# Altium PCB Frequency_REF_Module.PCBDOC
Units mm, origin at the board's own origin, x right, y up, seen from the top; angles counter-clockwise.
Board outline 160 x 100 mm, 4 copper layers (L1, L2, L3, L4), stack 1.57 mm thick; 49 components, 44 nets, 191 pads, 213 vias.
Unrouted connection lines stored in the file: 2.
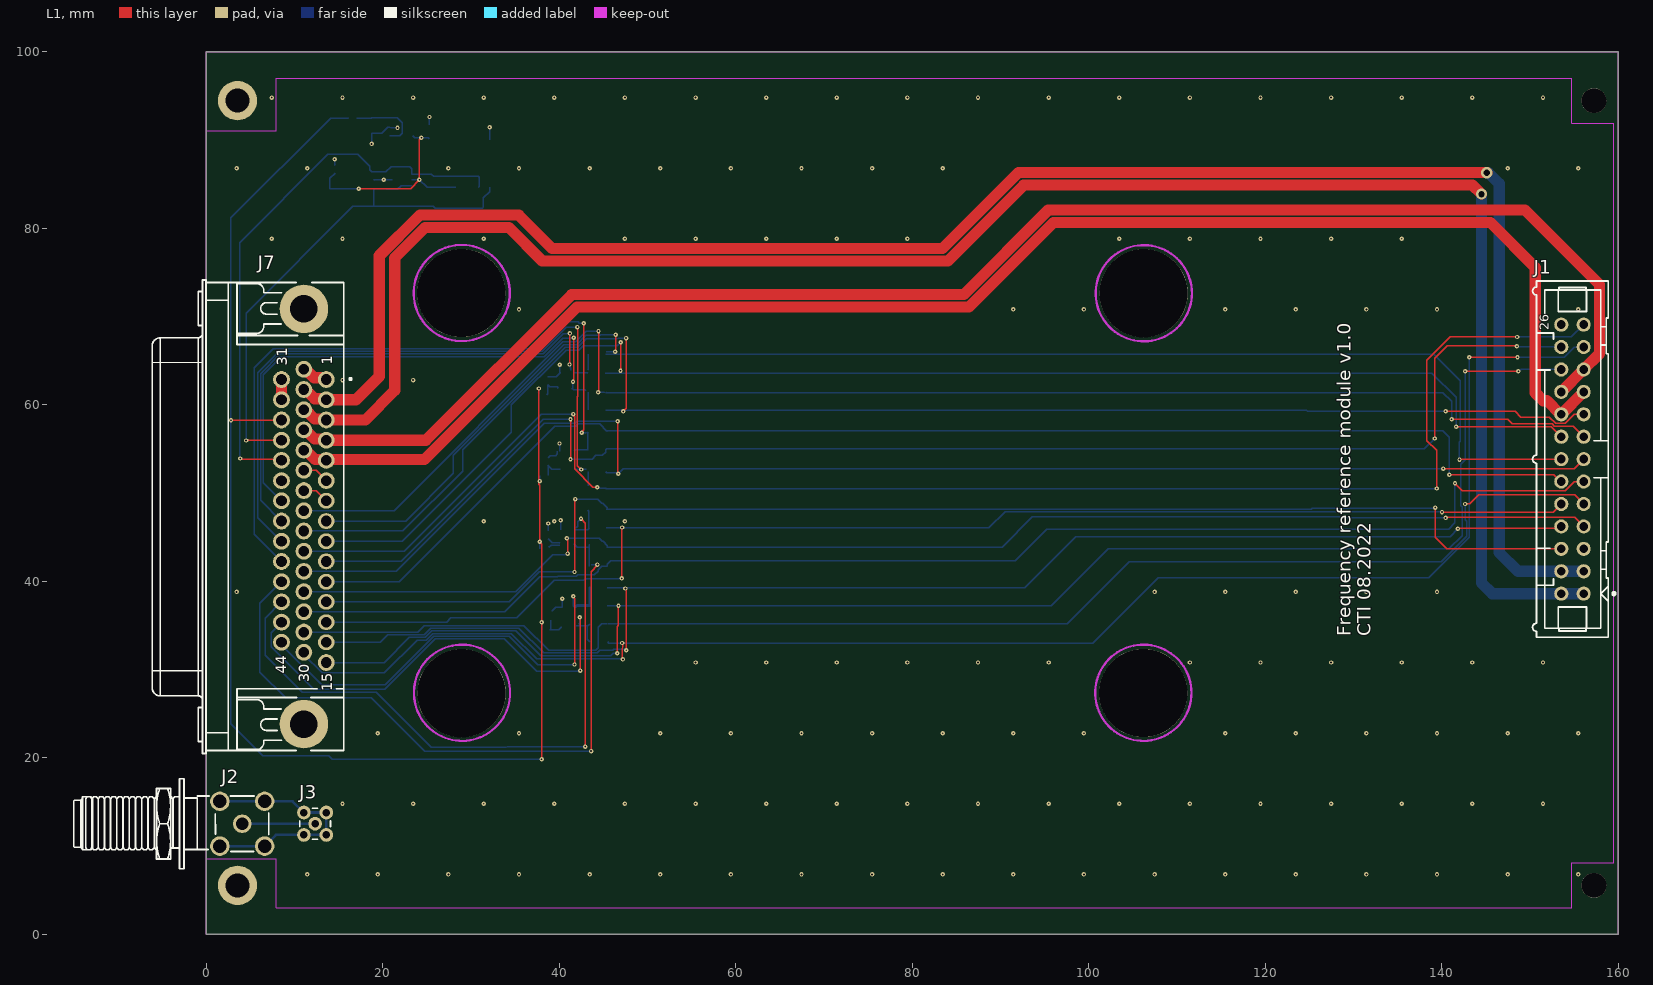
[diagram p0: L1 view]
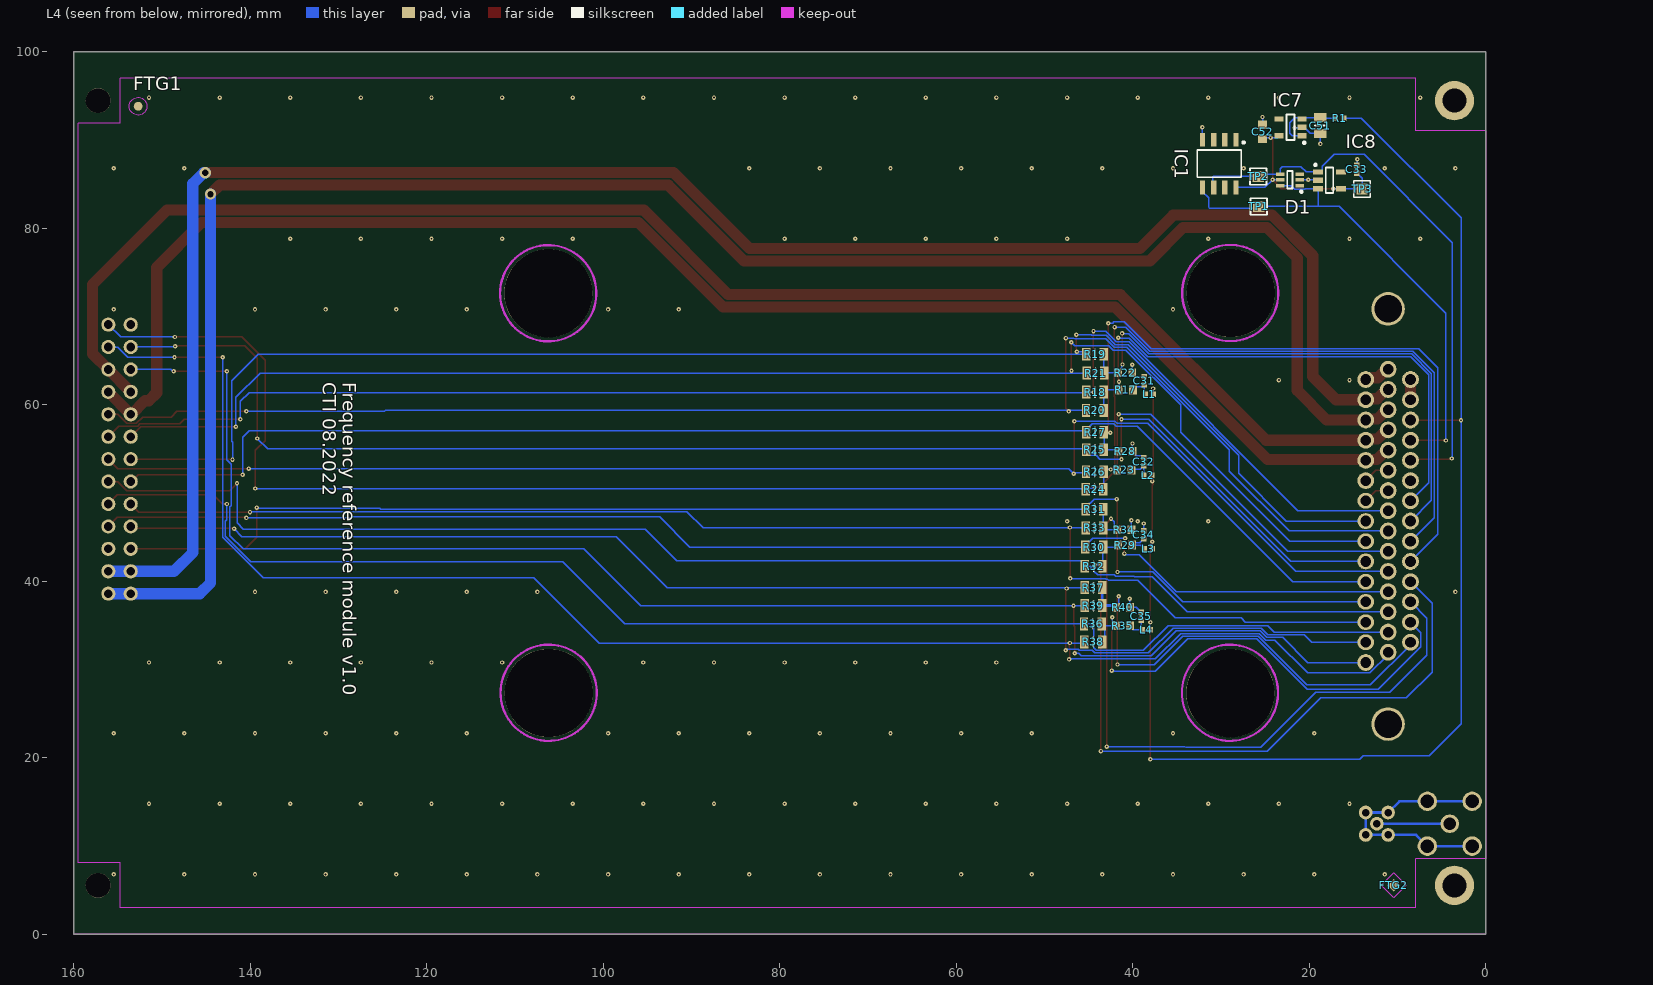
[diagram p1: L4 view, seen from below]
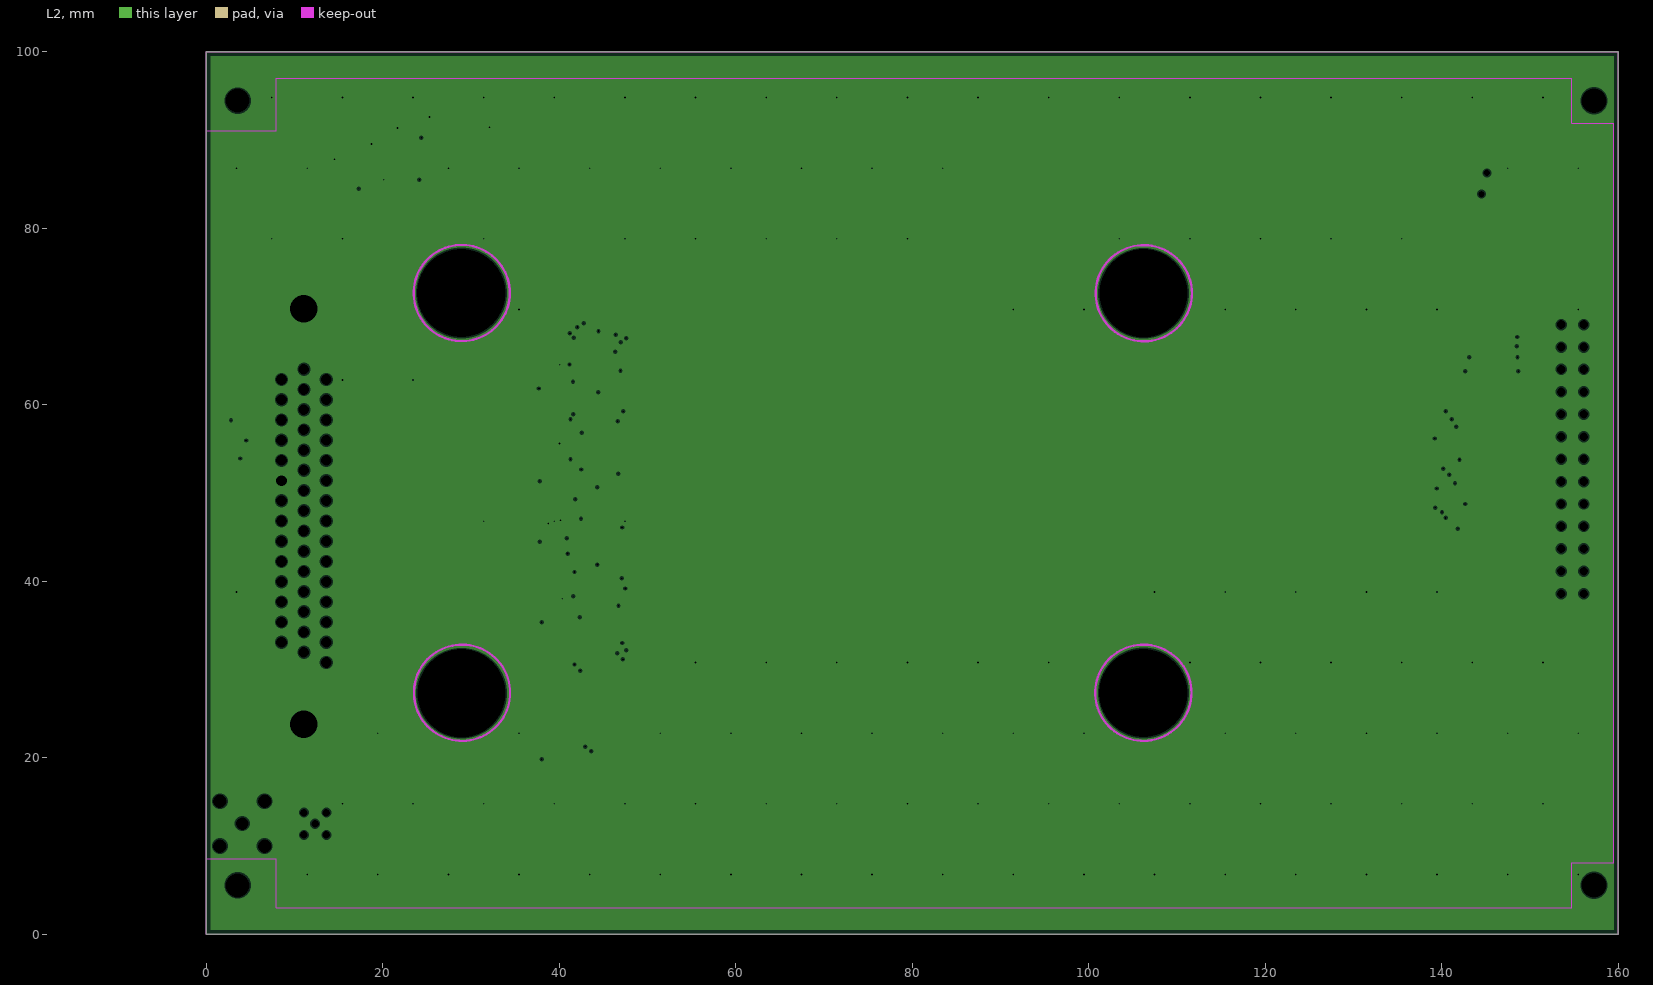
[diagram p2: L2, clearances drawn from the general rule]
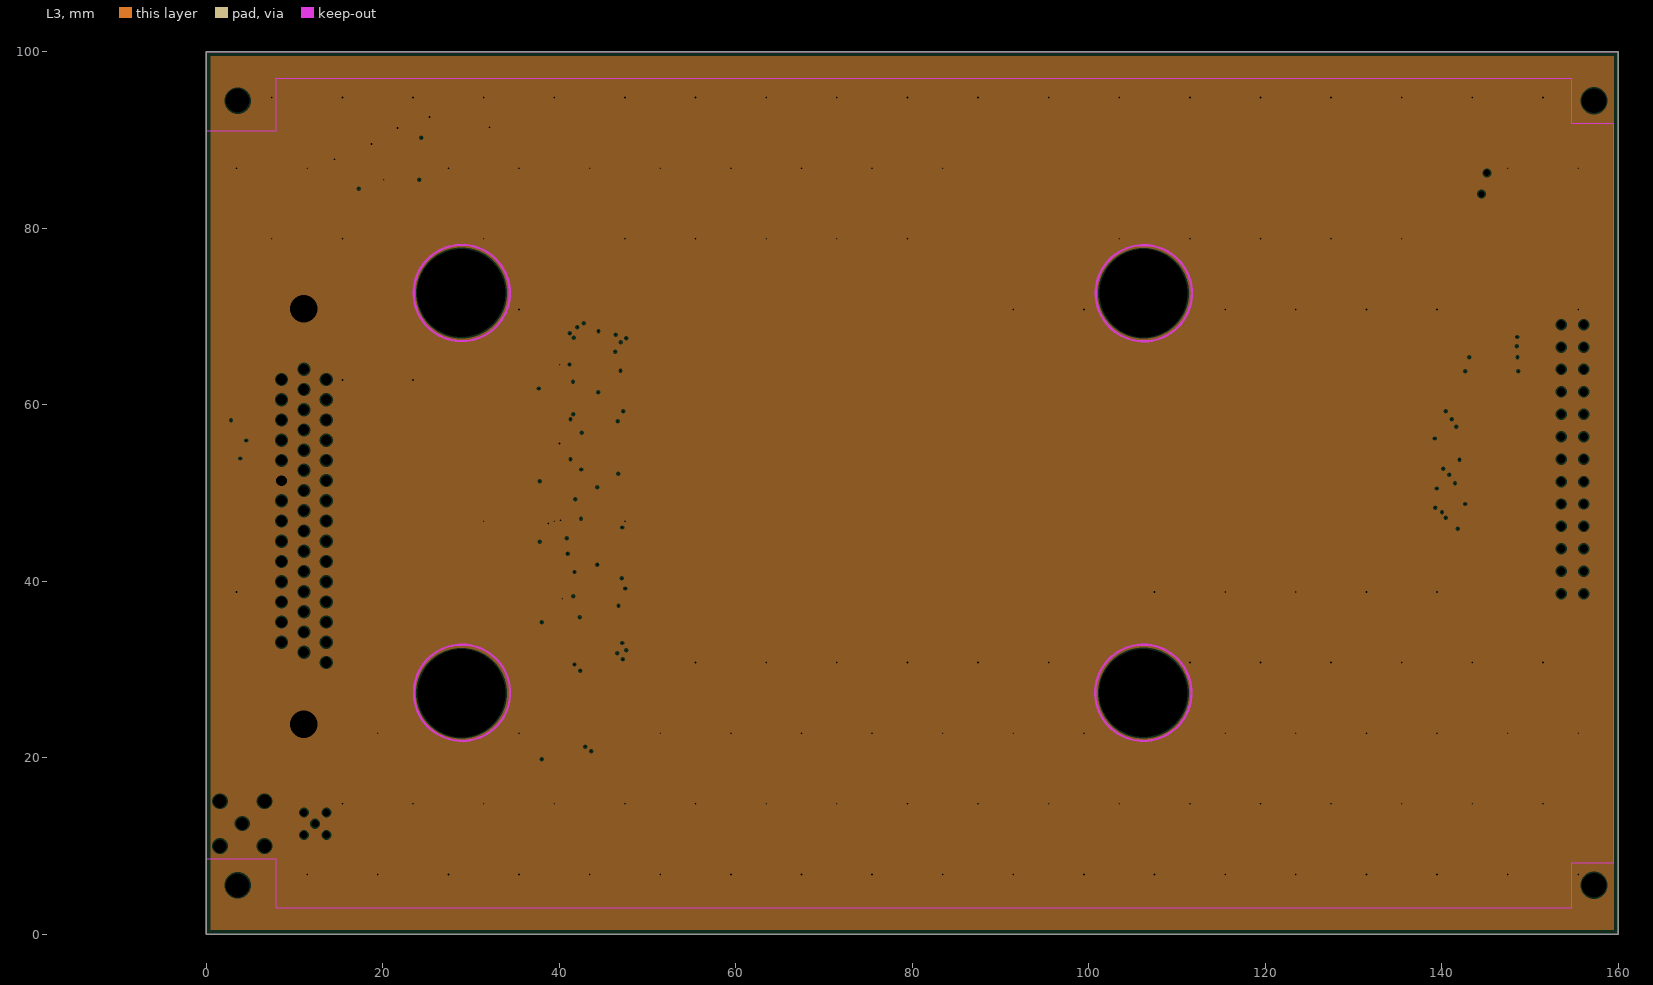
[diagram p3: L3, clearances drawn from the general rule]
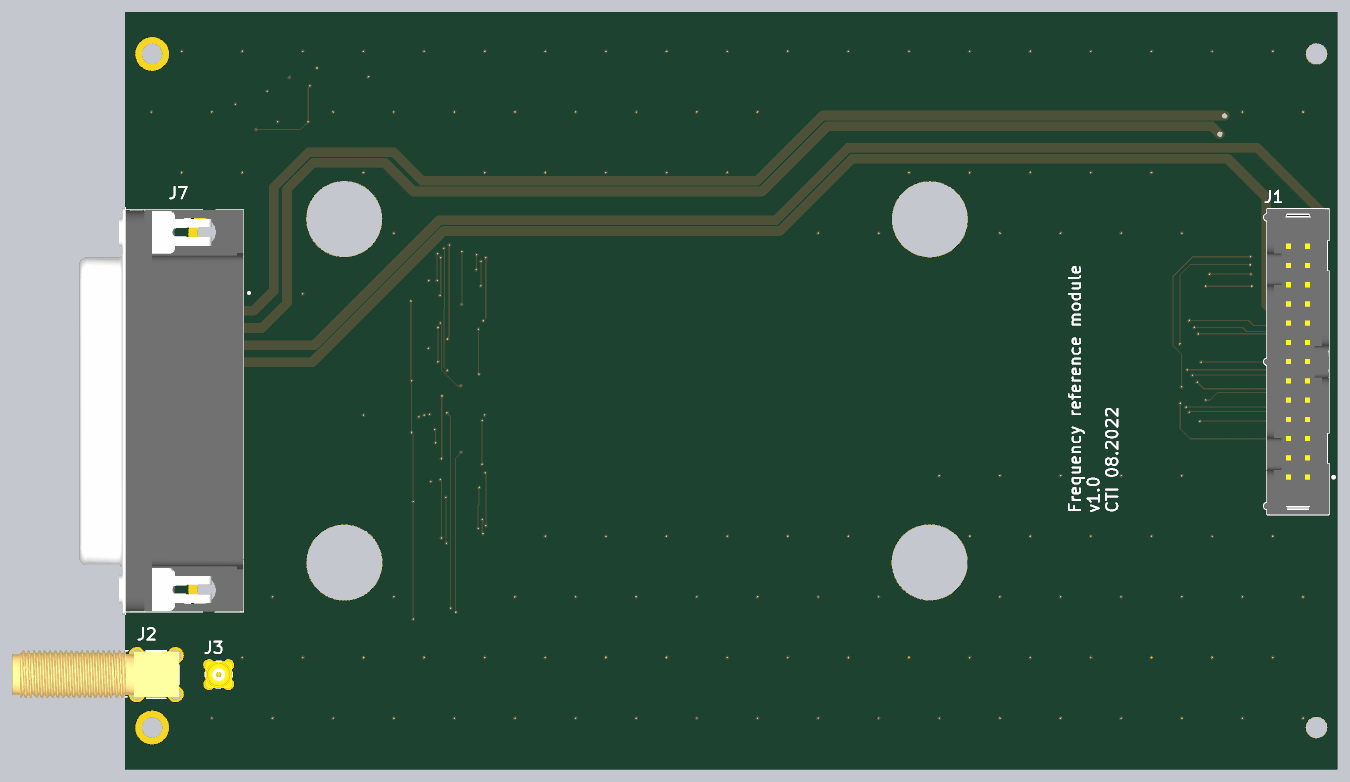
[diagram p4: 3D render of the assembled board from above, using the file's embedded part models]
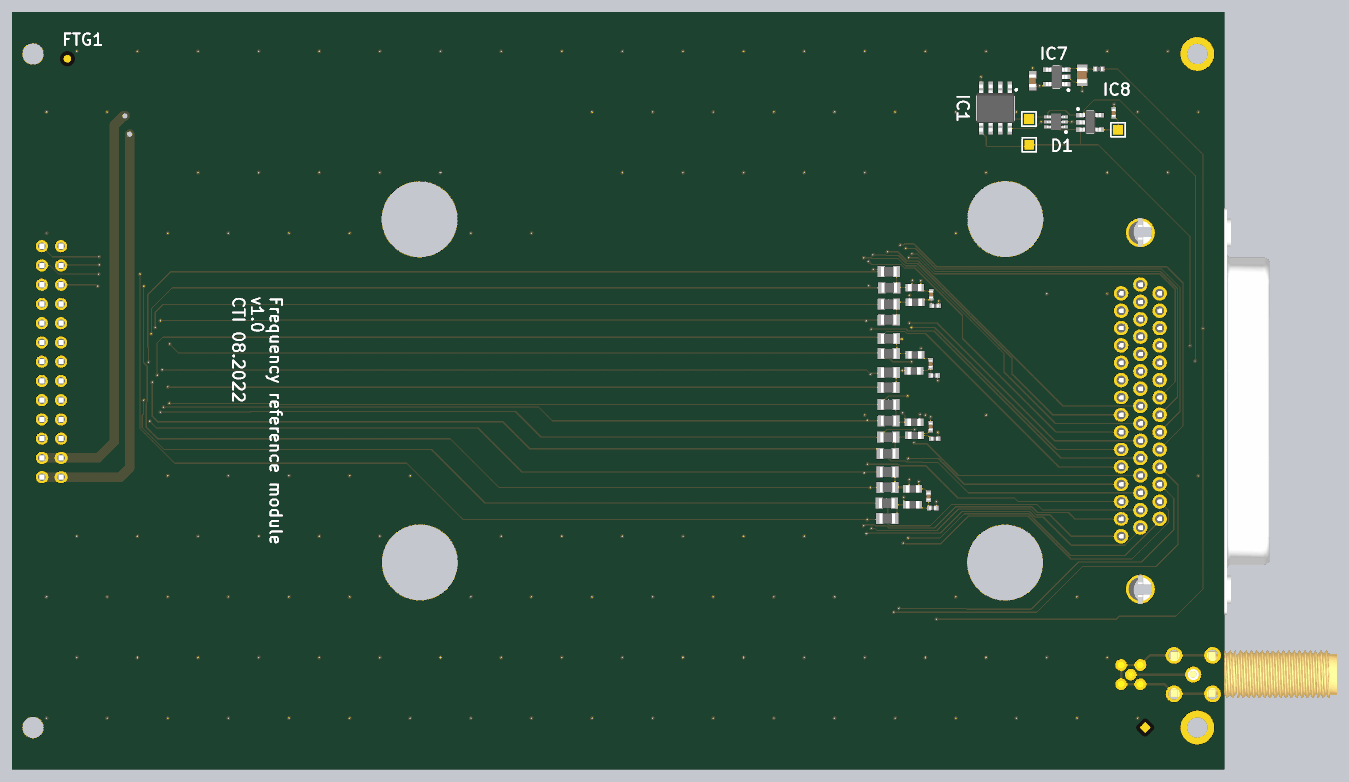
[diagram p5: 3D render of the assembled board from below, using the file's embedded part models]

## Layer stack, top to bottom
Top Solder: solder mask 0.01, Solder Resist, Dk 3.5
L1: signal copper 0.035
Dielectric 1: prepreg 0.36, PP-006, Dk 4.1
L2: plane copper 0.035, net GND
Dielectric1: core 0.71, FR-4, Dk 4.8
L3: plane copper 0.035, net GND
Dielectric 2: prepreg 0.36, PP-006, Dk 4.1
L4: signal copper 0.035
Bottom Solder: solder mask 0.01, Solder Resist, Dk 3.5

## Board outline
0,100 0,0 160,0 160,100

## Design rules (kind name [scope] priority, off if disabled: settings)
BoardOutlineClearance [All] p1: gap=0.254 ignorepadtopadclearanceinfootprint=FALSE except(0: Arc-SplitContinuation Track-SplitContinuation SMDPad-SplitContinuation THPad-SplitContinuation Via-SplitContinuation Fill-SplitContinuation Poly-SplitContinuation Region-SplitContinuation Text-SplitContinuation)
Clearance [All] p1: gap=0.152 ignorepadtopadclearanceinfootprint=FALSE
ComponentClearance [All] p1: gap=0 collisioncheckmode=3 verticalgap=0.1 showdistances=FALSE
FabricationTestPointUsage TestPointUsage [All] p1: valid=0 allowmultiple=FALSE
FabricationTestpoint Testpoint [All] p1: side=3 testpointundercomponent=TRUE minsize=1.016 maxsize=2.54 preferedsize=1.524 minholesize=0 maxholesize=1.016 preferedholesize=0.813 testpointgrid=0.025 allowsidetop=TRUE allowsidebottom=TRUE usegrid=TRUE gridtolerance=0
HoleSize [All] p1: absolutevalues=TRUE maxlimit=10 minlimit=0.2 maxpercent=80.000 minpercent=20.000
HoleToHoleClearance [All] p1: gap=0.2 allowstackedmicrovias=TRUE
MinimumSolderMaskSliver [All] p1: minsoldermaskwidth=0.1
PermittedLayers [All] p1: toplayerpermitted=TRUE bottomlayerpermitted=FALSE
PlaneClearance [All] p1: clearance=0.15
PlaneConnect [All] p1: pad.planeconnectstyle=Relief pad.reliefexpansion=0.508 pad.reliefentries=4 pad.reliefconductorwidth=0.381 pad.reliefairgap=0.381 via.planeconnectstyle=Direct via.reliefexpansion=0.508 via.reliefentries=4 via.reliefconductorwidth=0.381 via.reliefairgap=0.381
PolygonConnect "Vias Direct Connect" [IsVia] p1: connectstyle=Direct reliefconductorwidth=0.254 reliefentries=4 polygonreliefangle="90 Angle" airgapwidth=0.254
PolygonConnect [All] p2: connectstyle=Relief reliefconductorwidth=0.2 reliefentries=4 polygonreliefangle="90 Angle" airgapwidth=0.15
RoomDefinition Frequency_REF_Module [InComponentClass('Frequency_REF_Module')] p1 off: confinementstyle=ConfineIn formatcopy=TRUE lockcomponents=FALSE outline -17.714,3.747 29.276,3.747 29.276,96.634 -17.714,96.634
RoomDefinition U_Sensors_AFE1 [InComponentClass('U_Sensors_AFE1')] p2 off: confinementstyle=ConfineIn formatcopy=TRUE lockcomponents=FALSE outline 160.95,19.241 32.68,19.241 32.68,69.329 160.95,69.329
RoutingVias RoutingVias_HP [InNetClass('HP')] p1: holewidth=0.711 width=1.27 viastyle="Through Hole" minholewidth=0.711 minwidth=1.27 maxholewidth=0.711 maxwidth=1.27
RoutingVias [All] p2: holewidth=0.2 width=0.5 viastyle="Through Hole" minholewidth=0.2 minwidth=0.5 maxholewidth=0.6 maxwidth=1
SilkToSilkClearance [All] p1: silktosilkclearance=0.1
SilkToSolderMaskClearance SilkscreenOverComponentPads [IsPad] p1: minsilkscreentomaskgap=0.1 clearancetoexposedcopper=TRUE
SolderMaskExpansion SolderMaskExpansion_via [IsVia] p1: expansion=0.102 istentingtop=TRUE
SolderMaskExpansion [All] p2: expansion=0.05 istentingtop=FALSE
Width Width_HP [InNetClass('HP')] p1: maxlimit=1.27 minlimit=0.508 preferedwidth=0.762
Width [All] p2: maxlimit=2.54 minlimit=0.152 preferedwidth=0.152
20 further rules are at their usual default settings.

## Classes and differential pairs
net class HP: "FR TEC BG+" "FR TEC BG-" "FR TEC MIOB+" "FR TEC MIOB-"
component class U_Sensors_AFE1: C31 C32 C33 C34 C35 C51 C52 D1 IC1 IC7 IC8 L1 L2 L3 L4 R1 R17 R18 R19 R20 R21 R22 R23 R24 R25 R26 R27 R28 R29 R30 R31 R32 R33 R34 R35 R36 R37 R38 R39 R40 TP1 TP2 TP3
component class Frequency_REF_Module: FTG1 FTG2 J1 J2 J3 J7

## Components (designator, comment, footprint, x,y, rotation, side; value= is the part's Value field where it differs from the comment)
C31 "100nF" CAPC1005X55N 38.7,62.7 r270 bottom
C32 "100nF" CAPC1005X55N 38.776,53.556 r270 bottom
C33 "100nF" CAPC1005X55N 14.62,86.678 r270 bottom
C34 "100nF" CAPC1005X55N 38.776,45.276 r270 bottom
C35 "100nF" CAPC1005X55N 39.055,36.048 r270 bottom
C51 "10uF" CAPC2012X135N 18.786,91.631 r270 bottom
C52 "1uF" CAPC1608X87N 25.314,90.907 r270 bottom
D1 "DRTR5V0U4S-7" SOT65P210X110-6N 22.215,85.484 r0 bottom
FTG1 "Use only in PCB" FIDUCIAL_TOP_C100-200 152.695,93.815 r90 bottom
FTG2 "Use only in PCB" FIDUCIAL_TOP_S100-200 10.455,5.55 r90 bottom
IC1 "24AA02E48-I/SN" SOIC127P600X175-8N 30.216,87.313 r270 bottom
IC7 "ADP150AUJZ-3.3-R7" SOT95P280X90-5N 22.139,91.427 r0 bottom
IC8 "24AA02E48T-I/OT" SOT95P280X145-5N 17.719,85.426 r180 bottom
J1 "Header 26" 3M_N2526-6002RB 154.803,53.835 r90 top
J2 "SMA" DELOCK_65848 4.105,12.535 r180 top
J3 "Coax_1Female_1Shield" SAMTEC_MMCX-J-P-H-ST-TH1 12.36,12.535 r0 top
J7 "D-Sub" AMPHENOL_10090926-P444XLF 11.09,47.335 r90 top
L1 "220R@100MHz" INDC1005X55N 38.141,61.201 r180 bottom
L2 "220R@100MHz" INDC1005X55N 38.293,52.007 r180 bottom
L3 "220R@100MHz" INDC1005X55N 38.24,43.675 r180 bottom
L4 "220R@100MHz" INDC1005X55N 38.494,34.531 r180 bottom
R1 "33" RESC1005X40N 16.589,92.469 r0 bottom
R17 "0" RESC1608X55N 40.808,61.684 r180 bottom
R18 "5k" RESC2013X64N 44.288,61.43 r180 bottom
R19 "5k" RESC2013X64N 44.288,65.723 r180 bottom
R20 "5k" RESC2013X64N 44.313,59.347 r180 bottom
R21 "5k" RESC2013X64N 44.237,63.589 r180 bottom
R22 "0" RESC1608X55N 40.871,63.614 r0 bottom
R23 "0" RESC1608X55N 40.973,52.616 r180 bottom
R24 "5k" RESC2013X64N 44.338,50.432 r180 bottom
R25 "5k" RESC2013X64N 44.304,54.902 r180 bottom
R26 "5k" RESC2013X64N 44.313,52.413 r180 bottom
R27 "5k" RESC2013X64N 44.288,56.883 r180 bottom
R28 "0" RESC1608X55N 40.846,54.724 r0 bottom
R29 "0" RESC1608X55N 40.884,44.107 r180 bottom
R30 "5k" RESC2013X64N 44.38,43.879 r180 bottom
R31 "5k" RESC2013X64N 44.338,48.171 r180 bottom
R32 "5k" RESC2013X64N 44.44,41.694 r180 bottom
R33 "5k" RESC2013X64N 44.338,46.038 r180 bottom
R34 "0" RESC1608X55N 40.96,45.834 r0 bottom
R35 "0" RESC1608X55N 41.138,34.963 r180 bottom
R36 "5k" RESC2013X64N 44.542,35.166 r180 bottom
R37 "5k" RESC2013X64N 44.465,39.281 r180 bottom
R38 "5k" RESC2013X64N 44.491,33.134 r180 bottom
R39 "5k" RESC2013X64N 44.465,37.249 r180 bottom
R40 "0" RESC1608X55N 41.138,37.046 r0 bottom
TP1 "Test Point" TPS127 25.746,82.461 r180 bottom
TP2 "Test Point" TPS127 25.796,85.865 r180 bottom
TP3 "Test Point" TPS127 14.036,84.442 r180 bottom

## Footprints (in the part's own frame and the unit in brackets; to place one, negate y for a bottom-side part, rotate by r counter-clockwise, add the part's x,y. Pads: shape width x height; smd on the part's side, far side on the other; paste and mask are expansions set on the pad)
3M_N2526-6002RB [mm] "26 Contacts - Straight .100\" x .100\" Low Profile Four-Wall Header"
  round 1.6 hole 1: 1(-15.24,-1.27) 2(-15.24,1.27) 3(-12.7,-1.27) 4(-12.7,1.27) 5(-10.16,-1.27) 6(-10.16,1.27) 7(-7.62,-1.27) 8(-7.62,1.27) 9(-5.08,-1.27) 10(-5.08,1.27) 11(-2.54,-1.27) 12(-2.54,1.27) 13(0,-1.27) 14(0,1.27) 15(2.54,-1.27) 16(2.54,1.27) 17(5.08,-1.27) 18(5.08,1.27) 19(7.62,-1.27) 20(7.62,1.27) 21(10.16,-1.27) 22(10.16,1.27) 23(12.7,-1.27) 24(12.7,1.27) 25(15.24,-1.27) 26(15.24,1.27)
  silkscreen extent -20.17,-4.85 20.17,4.52, body extent -20.17,-4.11 20.17,4.52, height 9.91
AMPHENOL_10090926-P444XLF [mm] "Right Angle High Density D-sub 44 Male Contacts with Harpoons + UNC 4-40 Clinchnuts + Electrical Continuity"
  round 1.9 hole 1.2: 1(15.52,-2.54) 2(13.23,-2.54) 3(10.94,-2.54) 4(8.65,-2.54) 5(6.36,-2.54) 6(4.07,-2.54) 15(-16.54,-2.54) 16(16.682,0) 17(14.392,0) 18(12.102,0) 19(9.812,0) 20(7.522,0) 21(5.232,0) 22(2.942,0) 23(0.652,0) 24(-1.638,0) 25(-3.928,0) 26(-6.218,0) 27(-8.508,0) 28(-10.798,0) 29(-13.088,0) 30(-15.378,0) 31(15.52,2.54) 32(13.23,2.54) 33(10.94,2.54) 34(8.65,2.54) 35(6.36,2.54) 36(4.07,2.54) 37(1.78,2.54) 38(-0.51,2.54) 39(-2.8,2.54) 40(-5.09,2.54) 41(-7.38,2.54) 42(-9.67,2.54) 43(-11.96,2.54) 44(-14.25,2.54)
  oval 1.778x1.9 hole 1.2: 7(1.78,-2.54) 8(-0.51,-2.54) 9(-2.8,-2.54) 10(-5.09,-2.54) 11(-7.38,-2.54) 12(-9.67,-2.54) 13(-11.96,-2.54) 14(-14.25,-2.54)
  round 5.5 / inner round 3.8 / far side round 3.8 hole 3.1: 45(-23.513,0) 46(23.527,0)
  silkscreen extent -26.86,-5.4 26.8,17.18, body extent -26.86,-4.57 26.8,17.13, height 12.55
CAPC1005X55N [mm] "Capacitor, Non-Polarized, Chip; 1.00mm L X 0.50mm W X 0.70mm H, IPC Medium Density"
  rect 0.62x0.62 smd: 1(-0.45,0) 2(0.45,0)
  body extent -0.52,-0.27 0.53,0.28, height 0.55
CAPC1608X87N [mm] "Chip Capacitor, Body 1.6x0.8mm IPC Medium Density"
  rect 0.95x1 smd: 1(-0.8,0) 2(0.8,0)
  body extent -0.87,-0.47 0.88,0.48, height 0.87
CAPC2012X135N [mm] "Chip Capacitor, Body 2.0x1.25mm, IPC Medium Density"
  rect 1.05x1.4 smd: 1(-0.9,0) 2(0.9,0)
  silkscreen extent 0,-0.58 0,0.58, body extent -1.05,-0.67 1.05,0.68, height 1.25
DELOCK_65848 [mm] "50 Ohm Through Hole SMA Right Angle PCB Jack"
  round 2.1 hole 1.4: 1(0,0)
  round 2.2 hole 1.5: 2(-2.54,2.54) 2(-2.54,-2.54) 2(2.54,2.54) 2(2.54,-2.54)
  silkscreen extent -3,-5.1 19.1,5.1, body extent -3.04,-3.17 18.96,3.09, height 9.15
FIDUCIAL_TOP_C100-200 [mm] "Round Fiducial Target, Top Layer, 1.0mm, Top Solder 2.0mm, Keepout =2.0mm"
  round 1 smd paste-0.51 mask+0.5: FTG2(0,0)
  L1 keep-out circle w0.1: c0,0 r1
FIDUCIAL_TOP_S100-200 [mm] "Square Fiducial Target, Top Layer, 1.0mm, Top Solder 2.0mm, Keepout =2.0mm"
  rect 1x1 smd rot 45 paste-0.51 mask+0.5: 1(0,0)
  L1 keep-out region: 1.414,0 0,-1.414 -1.414,0 0,1.414
INDC1005X55N [mm] "Chip Inductor, 2-Leads, EIA 0402, Metric 1005, Body 1x0.5mm, 0402IPC Medium Density"
  rect 0.6x0.62 smd: 1(-0.46,0) 2(0.46,0)
  body extent -0.52,-0.27 0.53,0.28, height 0.55
RESC1005X40N [mm] "Chip Resistor, EIA 0402, Metric 1005, Body 1.0x0.5mm, IPC Medium Density"
  rect 0.58x0.62 smd: 1(-0.47,0) 2(0.47,0)
  body extent -0.52,-0.27 0.53,0.28, height 0.4
RESC1608X55N [mm] "Chip Resistor, EIA 0603, Metric 1608, Body 1.6x0.8mm, IPC Medium Density"
  rect 0.9x1 smd: 1(-0.8,0) 2(0.8,0)
  body extent -0.87,-0.47 0.88,0.48, height 0.55
RESC2013X64N [mm] "Chip Resistor, EIA 0805, Metric 2013, Body 2.03x1.27mm, IPC Medium Density"
  rect 0.95x1.45 smd: 1(-1,0) 2(1,0)
  silkscreen extent 0,-0.55 0,0.55, body extent -1.02,-0.63 1.02,0.64, height 0.64
SAMTEC_MMCX-J-P-H-ST-TH1 [mm] "Straight Through-hole 50 Ohm Micro Mini RF Jack, MMCX Serie"
  round 1.55 hole 0.85: 1(0,0) 2(-1.27,-1.27) 2(-1.27,1.27) 2(1.27,-1.27) 2(1.27,1.27)
  silkscreen extent -1.75,-1.75 1.75,1.75, body extent -1.75,-1.75 1.75,1.75, height 4.35
SOIC127P600X175-8N [mm] "SOIC 8, Pitch 1.27mm - Body 4x5mm, IPC Medium Density"
  rect 1.55x0.6 smd: 1(-2.7,1.905) 2(-2.7,0.635) 3(-2.7,-0.635) 4(-2.7,-1.905) 5(2.7,-1.905) 6(2.7,-0.635) 7(2.7,0.635) 8(2.7,1.905)
  silkscreen extent -2.52,-2.5 1.55,2.88, body extent -3.1,-2.5 3.1,2.5, height 1.75
SOT65P210X110-6N [mm] "SOT363, SC70-6, SOT, 0.65mm Pitch, 6 Pin, 1.25mm W X 2.00mm L X 1.10mm H, IPC Medium Density"
  rect 0.95x0.4 smd: 1(-1.1,0.65) 2(-1.1,0) 3(-1.1,-0.65) 4(1.1,-0.65) 5(1.1,0) 6(1.1,0.65)
  silkscreen extent -1.42,-1 0.3,1.47, body extent -1.2,-1.1 1.2,1.1, height 1.1
SOT95P280X90-5N [mm] "SOT, 0.95mm Pitch; 5 Pin, 1.60mm W X 2.90mm L X 0.90mm H body, IPC Medium"
  rect 1.05x0.6 smd: 1(-1.3,0.95) 2(-1.3,0) 3(-1.3,-0.95) 4(1.3,-0.95) 5(1.3,0.95)
  silkscreen extent -1.67,-1.45 0.45,1.87, body extent -1.4,-1.5 1.4,1.5, height 0.9
SOT95P280X145-5N [mm] "SOT, 0.95mm pitch; 5 pin, 1.60mm W X 2.90mm L X 1.45mm H body, IPC Medium Density"
  rect 1.1x0.6 smd: 1(-1.3,0.95) 2(-1.3,0) 3(-1.3,-0.95) 4(1.3,-0.95) 5(1.3,0.95)
  silkscreen extent -1.73,-1.45 0.43,1.87, body extent -1.4,-1.5 1.4,1.5, height 1.45
TPS127 [mm] "1.27 x  1.27mm SMD Test Point Area"
  rect 1.27x1.27 smd paste-1.27: 1(0,0)
  silkscreen extent -0.94,-0.94 0.94,0.94

## Part data
C31 C32 C33 C34 C35: library part CC0402_100NF_16V_10%_X5R, "Non-polarised capacitor", Case=0402, Manufacturer=GENERIC, Manufacturer1 ComponentHeight=0.55mm, Manufacturer1 Example=MURATA, Manufacturer1 Part Number=GRM155R61C104KA88D, Tolerance=±10%, Voltage=16V, Author="CERN DEM JLC", Component Type=Standard, CreateDate=10.12.2013, HelpURL=\\cern.ch\dfs\Applications\Altium\Datasheets\CC0402_X5R_MURATA_GRM.pdf, LatestRevisionDate=10.12.2013, Manufacturer Part Number=CC0402_100NF_16V_10%_X5R, Mounted=Yes, Part Description="SMD Multilayer Chip Ceramic Capacitor", Part Number=CC0402_100NF_16V_10%_X5R, Pin Count=2, Sense=No, SMD=Yes, Socket=No, Status=None, TC=X5R
C51: library part CC0805_10UF_16V_10%_X5R, "Non-polarised capacitor", Case=0805, Manufacturer=GENERIC, Manufacturer1 ComponentHeight=1.4mm, Manufacturer1 Example=KEMET, Manufacturer1 Part Number=C0805C106K4PAC, Tolerance=±10%, Voltage=16V, Author="CERN DEM JLC", Component Type=Standard, CreateDate=03.12.2007, HelpURL=\\cern.ch\dfs\Applications\Altium\Datasheets\CC1206_X5R_KEMET.pdf, LatestRevisionDate=03.12.2007, Manufacturer Part Number=CC0805_10UF_16V_10%_X5R, Mounted=Yes, Part Description="SMD Multilayer Chip Ceramic Capacitor", Part Number=CC0805_10UF_16V_10%_X5R, Pin Count=2, Sense=No, SMD=Yes, Socket=No, Status=Preferred, TC=X5R
C52: library part CC0603_1UF_25V_10%_X7R, "Non-polarised capacitor", Case=0603, Manufacturer=GENERIC, Manufacturer1 ComponentHeight=0.9mm, Manufacturer1 Example=MURATA, Manufacturer1 Part Number=GRM188R71E105KA12D, Tolerance=±10%, Voltage=25V, Author="CERN DEM JLC", Component Type=Standard, CreateDate=18/01/2011, HelpURL=\\cern.ch\dfs\Applications\Altium\Datasheets\CC0603_X7R_MURATA.pdf, LatestRevisionDate=18/01/2011, Manufacturer Part Number=CC0603_1UF_25V_10%_X7R, Mounted=Yes, Part Description="SMD Multilayer Chip Ceramic Capacitor", Part Number=CC0603_1UF_25V_10%_X7R, Pin Count=2, Sense=No, SMD=Yes, Socket=No, Status=None, TC=X7R
D1: library part D_TVS_DRTR5V0U4S-7, "Integrated Quad Ultra-Low Capacitance ESD Protection", Case=SOT363, Manufacturer=DIODES, Author=GK, Bonding=No, Component Type=Standard, ComponentHeight=1.1mm, CreateDate=24.01.2017, Device=DRTR5V0U4S-7, HelpURL=\\cern.ch\dfs\Applications\Altium\Datasheets\PRTR5V0U4Y.pdf, LatestRevisionDate=14.09.2020, Manufacturer Part Number=DRTR5V0U4S-7, Mounted=Yes, PackageDescription="SOT363, SC70-6, 0.65mm Pitch; 6 Pin, 1.25mm W X 2.00mm L X 1.10mm H body, IPC Medium Density", Part Description="Integrated Quad Ultra-Low Capacitance ESD (±8kV) Protection", Part Number=DRTR5V0U4S-7, Pin Count=6, PressFit=No, Sense=No, SMD=Yes, Socket=No, Status=Active, Status Comment=Active
FTG1: library part FIDUCIAL_TARGET_C100-200, "Fiducial Target", Author="CERN DEM JLC", Component Type="Standard (No BOM)", ComponentHeight=0mm, CreateDate=09.02.2010, Family=Fiducial, HelpURL=Undefined, LatestRevisionDate=04.04.2012, Mounted=No, PackageDescription="Round Fiducial Target, Top Layer, 1.0mm, Top Solder 2.0mm, Keepout =2.0mm", Part Description="Round Fiducial Target, Top Layer, 1.0mm, Top Solder 2.0mm, Keepout =2.0mm", Part Number=FIDUCIAL_TARGET_C100-200, Pin Count=1, Sense=No, SMD=Yes, Socket=No, Status=None
FTG2: library part FIDUCIAL_TARGET_S100-200, "Fiducial Target", Author="CERN DEM JLC", Component Type="Standard (No BOM)", ComponentHeight=0mm, CreateDate=09.02.2010, Family=Fiducial, HelpURL=Undefined, LatestRevisionDate=04.04.2012, Mounted=No, PackageDescription="Square Fiducial Target, Top Layer, 1.0mm, Top Solder 2.0mm, Keepout =2.0mm", Part Description="Square Fiducial Target, Top Layer, 1.0mm, Top Solder 2.0mm, Keepout =2.0mm", Part Number=FIDUCIAL_TARGET_S100-200, Pin Count=1, Sense=No, SMD=Yes, Socket=No, Status=None
IC1: library part MEM_24AA02E48-I/SN, "1.7V-5.5V, 2K I2C™ Serial EEPROMs with EUI-48™ Node Identity", Case=SOIC8, Manufacturer="MICROCHIP TECHNOLOGY", Author="CERN DEM MR", Bonding=No, Component Type=Standard, ComponentHeight=1.75mm, CreateDate=19.07.2016, Device=24AA02E48-I/SN, HelpURL=\\cern.ch\dfs\Applications\Altium\Datasheets\24AA025E48-I-SN.pdf, LatestRevisionDate=19.07.2016, Manufacturer Part Number=24AA02E48-I/SN, Mounted=Yes, PackageDescription="SOIC, 1.27mm Pitch; 8 Pin - Body 4x5mm, IPC Medium Density", Part Description="1.7V-5.5V, 2K I2C™ Serial EEPROMs with EUI-48™ Node Identity", Part Number=24AA02E48-I/SN, Pin Count=8, PressFit=No, Sense=No, SMD=Yes, Socket=No
IC7: "Ultralow Noise, 150 mA CMOS Linear Regulator", Case=SOT23, Manufacturer="ANALOG DEVICES", Author="CERN DEM JLC", Bonding=No, Component Type=Standard, ComponentHeight=0.9mm, CreateDate=27/09/2011, Device=ADP150AUJZ-3.3-R7, HelpURL=\\cern.ch\dfs\Applications\Altium\Datasheets\ADP150AUJZ-3.3-R7.pdf, LatestRevisionDate=19/06/2014, Manufacturer Part Number=ADP150AUJZ-3.3-R7, Mounted=Yes, PackageDescription="SOT23, 0.95mm pitch; 5 pin, 1.75mm W X 3.00mm L, IPC Medium Density", Part Description="3.3V, 150mA, Ultralow Noise, CMOS Linear Regulator", Part Number=ADP150AUJZ-3.3-R7, Pin Count=5, PressFit=No, Sense=No, SMD=Yes, Socket=No
IC8: "1.7V-5.5V, 2K I2C Serial EEPROM With EUI-48 Node Identity", Case=SOT23-5, Manufacturer="MICROCHIP TECHNOLOGY", Author="CERN DEM MR", Bonding=No, Component Type=Standard, ComponentHeight=1.45mm, CreateDate=31.03.2016, Device=24AA02E48T-I/OT, HelpURL=\\cern.ch\dfs\Applications\Altium\Datasheets\24AA02E48T-I-OT.pdf, LatestRevisionDate=31.03.2016, Manufacturer Part Number=24AA02E48T-I/OT, Mounted=Yes, PackageDescription="SOT, 0.95mm pitch; 5 pin, 1.60mm W X 2.90mm L X 1.45mm H body, IPC Medium Density", Part Description="1.7V-5.5V, 2K I2C Serial EEPROM With EUI-48 Node Identity", Part Number=24AA02E48T-I/OT, Pin Count=5, PressFit=No, Sense=No, SMD=Yes, Socket=No
J1: library part 3M_N2526-6002RB, "Connector 26 Male", Manufacturer=3M, Manufacturer Part Number=N2526-6002RB, Author="CERN DEM JLC", Component Type=Standard, ComponentHeight=10.03mm, CreateDate=11.02.2009, Family="Header 26", HelpURL=\\cern.ch\dfs\Applications\Altium\Datasheets\3M_N2526-6002RB.pdf, LatestRevisionDate=11.08.2009, Mounted=Yes, Part Description="26 Contacts, Straight .100'' x .100'' Low Profile Four-Wall Header, 2500 Series", Part Number=3M_N2526-6002RB, Pin Count=26, PressFit=No, Sense=No, SMD=No, Socket=No, Status=None
J2: library part CON_SMA_DELOCK_65848, "50 Ohm Through Hole SMA Right Angle PCB Jack", Manufacturer=DELOCK, Manufacturer Part Number="5848 (4043619658480)", Part Number=DELOCK_65848, Author=GK, Component Type=Standard, ComponentHeight=12.5, CreateDate=13.05.2019, Family=SMA, HelpURL=\\cern.ch\dfs\Applications\Altium\Datasheets\AMPHENOL_132203-16.pdf, LatestRevisionDate=13.05.2019, Mounted=Yes, Part Description="50 Ohm Through Hole SMA Right Angle PCB Jack", Pin Count=5, PressFit=No, Sense=No, SMD=No, Socket=No, Status=None
J3: library part SAMTEC_MMCX-J-P-H-ST-TH1, Manufacturer=SAMTEC, Manufacturer Part Number=MMCX-J-P-H-ST-TH1, Author="CERN DEM JLC", Component Type=Standard, ComponentHeight=4.35mm, CreateDate=05.12.2012, HelpURL=\\cern.ch\dfs\Applications\Altium\Datasheets\SAMTEC_MMCX-J-P-H-ST-TH1.pdf, LatestRevisionDate=05.12.2012, Mounted=Yes, Part Description="Straight Through-hole 50 Ohm Micro Mini RF Jack, MMCX Series", Part Number=SAMTEC_MMCX-J-P-H-ST-TH1, Pin Count=2, PressFit=No, Sense=No, SMD=No, Socket=No, Status=None
J7: library part AMPHENOL_10090926-P444XLF, "Connector D-sub 44 Male", Manufacturer=AMPHENOL, Manufacturer Part Number=10090926-P444XLF, Author="CERN DEM BC", Component Type=Standard, ComponentHeight=12.8mm, CreateDate=22.10.2020, Family=D-Sub, HelpURL=\\cern.ch\dfs\Applications\Altium\Datasheets\AMPHENOL_10090926-P444XLF.pdf, LatestRevisionDate=22.10.2020, Mounted=Yes, Part Description="Right Angle High Density D-sub 44 Male Contacts with Harpoons + UNC 4-40 Clinchnuts + Electrical Continuity", Part Number=AMPHENOL_10090926-P444XLF, Pin Count=46, PressFit=No, Sense=No, SMD=No, Socket=No, Status=None
L1 L2 L3 L4: library part IND0402_MURATA_BLM15HB221SN1, Case=0402, Manufacturer=MURATA, Manufacturer Part Number=BLM15HB221SN1, Power=250mA, Resistance=1R, Tolerance=±25%, Author="CERN DEM JLC", Component Type=Standard, ComponentHeight=0.55mm, CreateDate=23.06.2009, HelpURL=\\cern.ch\dfs\Applications\Altium\Datasheets\IND0402_MURATA_BLM15H.pdf, LatestRevisionDate=25.10.2018, Mounted=Yes, Part Description="SMD EMIFIL Suppression Chip Ferrite Bead", Part Number=IND0402_MURATA_BLM15HB221SN1, Pin Count=2, Sense=No, SMD=Yes, Socket=No, Status=None
R1: library part R0402_33R_1%_0.0625W_100PPM, "Resistor - 1%", Case=0402, Manufacturer=GENERIC, Manufacturer1 ComponentHeight=0.4mm, Manufacturer1 Example="YAGEO PHYCOMP", Manufacturer1 Part Number=232270673309L, Power=0.0625W, Tolerance=±1%, Author="CERN DEM JLC", Component Type=Standard, CreateDate=03/12/2007, HelpURL=\\cern.ch\dfs\Applications\Altium\Datasheets\R0402_Phycomp_RC0402.pdf, LatestRevisionDate=17/10/2012, Manufacturer Part Number=R0402_33R_1%_0.0625W_100PPM, Mounted=Yes, Part Description="General Purpose Thick Film Chip Resistor", Part Number=R0402_33R_1%_0.0625W_100PPM, Pin Count=2, PressFit=No, Sense=No, SMD=Yes, Socket=No, Status="Not Recommended", TC=±100ppm/°C
R17 R22 R23 R28 R29 R34 R35 R40: library part R0603_0R_JUMPER, "Resistor", Case=0603, Manufacturer=GENERIC, Manufacturer1 ComponentHeight=0.55mm, Manufacturer1 Example="NIC COMPONENT", Manufacturer1 Part Number=NRC06Z0, Author="CERN DEM JLC", Component Type=Standard, CreateDate=03.12.2007, HelpURL=\\cern.ch\dfs\Applications\Altium\Datasheets\R0603_NIC_NRC.pdf, LatestRevisionDate=13.03.2008, Manufacturer Part Number=R0603_0R_JUMPER, Mounted=Yes, Part Description="1A (0.05R Max DC Resistance) Zero Ohm Jumper", Part Number=R0603_0R_JUMPER, Pin Count=2, PressFit=No, Sense=No, SMD=Yes, Socket=No, Status=Preferred
R18 R19 R20 R21 R24 R25 R26 R27 R30 R31 R32 R33 R36 R37 R38 R39: library part R0805_5K_0.01%_0.2W_0.2PPM_VISHAY_VSMP, "Resistor - 0.01%", Case=0805, Manufacturer="VISHAY PRECISION", Manufacturer1 ComponentHeight=0.64mm, Manufacturer Part Number=Y16245K00000T9R, Power=0.2W, Tolerance=±0.01%, Author="CERN DEM JLC", Component Type=Standard, CreateDate=22.09.2011, HelpURL=\\cern.ch\dfs\Applications\Altium\Datasheets\R0805_VISHAY_VSMP.pdf, LatestRevisionDate=22.09.2011, Mounted=Yes, Part Description="Ultra High Precision Foil Wraparound Surface Mount Chip Resistor", Part Number=R0805_5K_0.01%_0.2W_0.2PPM_VISHAY_VSMP, Pin Count=2, PressFit=No, Sense=No, SMD=Yes, Socket=No, Status=None, TC=±0.2ppm/°C
TP1 TP2 TP3: library part SMD_PAD_1.27X1.27MM, Author="CERN DEM JLC", Component Type="Standard (No BOM)", ComponentHeight=0mm, CreateDate=12.01.2008, Family="Test Point", HelpURL=Undefined, LatestRevisionDate=12.01.2008, Mounted=No, PackageDescription="1.27mm x 1.27mm PCB Copper Area (SMD Test Point)", Part Description="1.27mm x 1.27mm PCB Copper Area (SMD Test Point)", Part Number=SMD_PAD_1.27X1.27MM, Pin Count=1, Sense=No, SMD=Yes, Socket=No, Status=None

## Free pads (board coordinates)
  round 2.8 hole 2.8: 1(157.24,5.55) 1(157.24,94.45)
  round 10 hole 10: 2(28.921,72.657) 2(28.946,27.318) 2(106.187,27.343) 2(106.213,72.631)
  round 4.45 hole 2.7: P1(3.57,94.45) P2(3.57,5.55)

## Via types
v1: diameter 0.5, hole 0.2, L1 to L4, tented both sides, 211 vias
v2: diameter 1.27, hole 0.711, L1 to L4, tented both sides, 2 vias

## Nets (pads, with @x,y where several pads share a name; then routed paths per layer and width w, separated by ;. In a path a pad name is that pad's centre, name@x,y a point inside that pad or via, vN(x,y) a via of type N, cw(c..) or ccw(c..) an arc to the next point about the centre after c; other vN are vias at no path point)
AFE2_SCL: D1.4 IC1.6 IC8.1 J7.35 TP2.1 | length 63.9
  L1 w0.152: v1(3.876,53.912) 3.943,53.845 8.4,53.845 J7.35
  L4 w0.152: v1(3.876,53.912) 3.825,53.962 3.825,78.372 13.808,88.354 17.211,88.354 18.545,87.02 18.545,86.6 18.769,86.376 IC8.1 20.359,86.376 20.965,86.982 23.053,86.982 23.315,86.721 D1.4 25.527,86.134 TP2.1 30.863,85.865 30.953,85.776 30.953,84.714 IC1.6
AFE2_SDA: D1.6 IC1.5 IC8.3 J7.34 TP1.1 | length 59.6
  L1 w0.152: v1(4.537,55.944) 4.578,55.985 J7.34
  L4 w0.152: v1(4.537,55.944) 4.537,70.371 16.627,82.461 19.015,82.461 ; D1.6 22.113,84.834 21.685,84.405 20.545,84.405 20.475,84.476 IC8.3 19.015,84.471 19.015,82.461 ; IC1.5 32.121,84.138 31.435,83.452 31.435,82.347 31.346,82.258 25.949,82.258 TP1.1 19.015,82.461
"FR TEC BG+": J1.20 J1.21 J7.4 J7.19 | length 175.5
  L1 w1.27: J7.19 11.26,57.147 12.302,56.106 13.493,56.106 13.63,55.969 13.646,55.985 24.918,55.985 41.438,72.504 85.862,72.504 95.413,82.055 149.418,82.055 157.851,73.622 157.851,65.773 J1.21 J1.20
"FR TEC BG-": J1.18 J1.19 J7.5 J7.20 | length 174.9
  L1 w1.27: J7.20 11.26,54.857 12.333,53.785 24.73,53.785 42.027,71.082 86.452,71.082 96.002,80.632 145.507,80.632 150.587,75.552 150.587,61.361 151.485,60.463 151.896,60.463 153.444,58.915 J1.18 J1.19
"FR TEC MIOB+": J1.3 J1.4 J7.2 J7.17 | length 210.4
  L1 w1.27: J7.17 11.26,61.727 12.302,60.686 13.485,60.686 J7.2@13.618,60.553 ; J7.2 16.983,60.565 19.624,63.207 19.624,76.878 24.242,81.496 35.423,81.496 39.208,77.711 83.449,77.711 92.06,86.322 v2@145.1,86.322
  L4 w1.27: v2(145.1,86.271) 145.278,86.271 146.497,85.052 146.497,43.269 148.631,41.135 J1.4 J1.3
"FR TEC MIOB-": J1.1 J1.2 J7.3 J7.18 | length 213.4
  L1 w1.27: J7.18 11.26,59.437 12.302,58.396 13.618,58.396 13.63,58.407 13.762,58.275 18.049,58.275 21.377,61.602 21.377,76.619 24.831,80.074 34.305,80.074 38.09,76.289 84.039,76.289 92.649,84.9 143.449,84.9 v2(144.491,83.858)
  L4 w1.27: v2(144.491,83.858) 144.491,39.822 145.717,38.595 J1.2 J1.1
"FR_Temperature Sensor 1_1": J1.15 J7.23 R18.1 | length 163.6
  L1 w0.152: v1(44.415,61.405) 44.465,61.455 v1(44.465,68.339) ; v1(141.112,58.357) 147.453,58.357 147.987,57.823 152.516,57.823 152.757,57.582 154.866,57.582 J1.15
  L4 w0.152: J7.23 21.3,47.987 40.423,67.11 41.858,67.11 43.087,68.339 v1(44.465,68.339) ; v1(44.415,61.405) 45.1,61.405 R18.1@45.126,61.379 ; R18.1 45.338,61.379 140.122,61.379 141.112,60.389 v1(141.112,58.357)
"FR_Temperature Sensor 1_2": J1.14 J7.8 R19.1 | length 164.3
  L1 w0.152: v1(46.345,66.002) 46.396,66.053 v1(46.396,67.932) ; v1(142.001,53.785) 142.027,53.81 153.508,53.81 J1.14
  L4 w0.152: J7.8 22.621,46.825 28.032,52.235 28.032,54.287 40.549,66.805 41.984,66.805 43.04,67.86 44.664,67.86 44.736,67.932 v1(46.396,67.932) ; R19.1 45.313,65.697 139.106,65.697 142.099,62.704 142.099,55.846 142.001,55.749 v1(142.001,53.785) ; R19.1@45.329,66.002 v1(46.345,66.002)
"FR_Temperature Sensor 2_1": J1.17 J7.24 R20.1 | length 167.2
  L1 w0.152: v1(47.259,59.246) 47.59,59.576 v1(47.59,67.551) ; v1(140.427,59.271) 148.301,59.271 148.961,58.611 152.16,58.611 152.884,57.887 153.959,57.887 154.988,58.915 J1.17
  L4 w0.152: J7.24 22.306,45.697 29.098,52.489 29.098,54.923 40.675,66.5 42.111,66.5 43.064,67.454 46.594,67.454 46.692,67.551 v1(47.59,67.551) ; R20.1 124.679,59.347 124.755,59.271 v1(140.427,59.271)
"FR_Temperature Sensor 2_2": J1.16 J7.9 R21.1 | length 161
  L1 w0.152: v1(46.955,63.843) 46.967,63.856 46.967,67.06 v1(46.98,67.073) ; v1(141.62,57.518) 152.39,57.518 J1.16
  L4 w0.152: J7.9 22.211,44.535 34.585,56.909 34.585,59.979 40.802,66.195 42.237,66.195 42.718,66.676 46.583,66.676 v1(46.98,67.073) ; R21.1 138.877,63.589 141.62,60.846 v1(141.62,57.518)
"FR_Temperature Sensor 3_1": J1.25 J7.25 R24.1 | length 176.3
  L1 w0.152: v1(41.599,58.941) 41.599,58.847 41.773,58.673 41.773,52.727 43.834,50.665 44.308,50.665 v1(44.313,50.66) ; v1(139.436,50.508) 139.436,54.826 138.318,55.944 138.318,65.062 140.935,67.678 v1(148.529,67.678)
  L4 w0.152: J7.25 22.429,43.407 37.963,58.941 v1(41.599,58.941) ; v1(44.313,50.66) 44.407,50.66 44.534,50.533 R24.1@45.329,50.533 ; R24.1 45.364,50.457 139.385,50.457 v1(139.436,50.508) ; v1(148.529,67.678) 154.676,67.678 J1.25
"FR_Temperature Sensor 3_2": J1.24 J7.10 R25.1 | length 162
  L1 w0.152: v1(41.29,53.822) 41.292,53.824 41.292,58.352 v1(41.294,58.354) ; v1(139.207,56.172) 139.207,65.265 140.604,66.662 148.478,66.662 v1(148.504,66.637)
  L4 w0.152: J7.10 22.131,42.245 38.217,58.331 41.272,58.331 v1(41.294,58.354) ; v1(41.29,53.822) 43.747,53.822 44.178,54.253 44.905,54.253 45.278,54.627 R25.1@45.278,54.928 ; R25.1 45.405,55.004 138.039,55.004 v1(139.207,56.172) ; v1(148.504,66.637) 148.555,66.586 153.482,66.586 J1.24
"FR_Temperature Sensor 4_1": J1.13 J7.26 R26.1 | length 160
  L1 w0.152: v1(46.624,58.128) 46.662,58.09 46.662,52.223 v1(46.701,52.184) ; v1(140.173,52.769) 155.006,52.769 J1.13
  L4 w0.152: J7.26 21.536,41.117 38.295,57.875 41.777,57.875 42.043,58.142 46.611,58.142 v1(46.624,58.128) ; R26.1 45.415,52.311 46.701,52.311 46.717,52.295 46.817,52.295 47.264,52.743 140.147,52.743 v1(140.173,52.769)
"FR_Temperature Sensor 4_2": J1.12 J7.11 R27.1 | length 152.6
  L1 w0.152: v1(140.858,52.057) 152.707,52.057 153.469,51.295 J1.12
  L4 w0.152: J7.11 21.873,39.955 39.488,57.571 41.903,57.571 42.169,57.837 44.584,57.837 45.411,57.01 45.461,57.061 140.122,57.061 140.858,56.325 v1(140.858,52.057)
"FR_Temperature Sensor 5_1": J1.7 J7.27 R30.1 | length 151
  L1 w0.152: v1(40.884,44.869) 40.96,44.793 v1(40.96,43.142) ; v1(140.427,47.181) 140.49,47.244 155.044,47.244 J1.7
  L4 w0.152: J7.27 35.096,38.827 39.284,43.015 40.833,43.015 v1(40.96,43.142) ; v1(40.884,44.869) 44.542,44.869 44.883,44.527 44.981,44.527 45.456,44.052 R30.1@45.456,43.955 ; R30.1 90.211,43.879 93.614,47.282 128.463,47.282 128.565,47.181 v1(140.427,47.181)
"FR_Temperature Sensor 5_2": J1.6 J7.12 R31.1 | length 154.1
  L1 w0.152: v1(41.748,41.055) 41.786,41.093 41.786,49.276 v1(41.824,49.314) ; v1(139.258,48.345) 139.258,44.971 140.554,43.675 J1.6
  L4 w0.152: J7.12 34.365,37.665 37.755,41.055 v1(41.748,41.055) ; v1(41.824,49.314) 44.364,49.314 44.858,48.82 44.94,48.82 45.456,48.304 R31.1@45.456,48.222 ; R31.1 125.187,48.171 125.314,48.298 139.211,48.298 v1(139.258,48.345)
"FR_Temperature Sensor 6_1": J1.11 J7.28 R32.1 | length 154.6
  L1 w0.152: v1(141.493,51.118) 142.344,50.267 153.959,50.267 154.988,51.295 J1.11
  L4 w0.152: J7.28 33.822,36.537 37.824,40.54 39.868,40.54 ; 39.868,40.577 41.946,40.577 42.11,40.741 44.01,40.741 44.415,41.146 44.415,41.289 44.821,41.694 R32.1 45.44,41.944 45.839,42.343 91.672,42.343 95.24,45.911 140.782,45.911 141.493,46.622 v1(141.493,51.118)
"FR_Temperature Sensor 6_2": J1.10 J7.13 R33.1 | length 150.6
  L1 w0.152: v1(47.107,40.323) 47.12,40.335 47.12,46.076 v1(47.132,46.088) ; v1(140.02,47.841) 152.619,47.841 J1.10
  L4 w0.152: J7.13 27.25,35.375 27.727,35.852 35.182,35.852 39.427,40.098 42.759,40.098 42.896,40.235 43.026,40.235 43.092,40.301 47.086,40.301 v1(47.107,40.323) ; R33.1 88.687,46.038 90.516,47.866 139.995,47.866 v1(140.02,47.841)
"FR_Temperature Sensor 7_1": J1.9 J7.29 R36.1 | length 157.8
  L1 w0.152: v1(142.64,48.755) 143.17,48.755 144.198,49.784 155.044,49.784 J1.9
  L4 w0.152: J7.29 23.988,34.247 24.729,34.989 36.007,34.989 38.815,32.181 44.172,32.181 44.44,32.449 44.44,34.785 44.846,35.192 R36.1@45.456,35.192 ; R36.1 97.551,35.166 104.613,42.228 139.919,42.228 142.814,45.123 142.814,46.805 142.64,46.979 v1(142.64,48.755)
"FR_Temperature Sensor 7_2": J1.8 J7.14 R37.1 | length 153.8
  L1 w0.152: v1(47.513,39.18) 47.615,39.078 v1(47.615,32.195) ; v1(141.824,45.961) 141.89,46.028 153.345,46.028 J1.8
  L4 w0.152: J7.14 19.753,33.085 20.61,33.942 24.702,33.942 25.444,34.684 35.448,34.684 38.256,31.876 44.298,31.876 44.603,32.181 46.06,32.181 46.194,32.315 v1@47.444,32.315 ; R37.1 92.725,39.281 98.517,45.072 140.935,45.072 v1(141.824,45.961)
"FR_Temperature Sensor 8_1": J1.23 J7.30 R38.1 | length 178.8
  L1 w0.152: v1(47.136,33.007) 47.203,32.941 47.203,32.535 47.234,32.504 47.136,32.406 47.136,31.345 47.234,31.247 v1(47.234,31.153) ; v1(143.119,65.392) v1(148.58,65.392)
  L4 w0.152: J7.30 11.09,31.668 13.142,29.616 20.196,29.616 23.912,33.333 24.955,33.333 25.696,34.074 34.585,34.074 37.455,31.204 47.183,31.204 v1(47.234,31.153) ; R38.1 45.618,33.007 v1(47.136,33.007) 100.472,33.007 107.889,40.424 138.547,40.424 143.119,44.996 v1(143.119,65.392) ; v1(148.58,65.392) 153.845,65.392 154.988,66.535 J1.23
"FR_Temperature Sensor 8_2": J1.22 J7.15 R39.1 | length 171.1
  L1 w0.152: v1(46.598,31.836) 46.598,34.873 46.726,35.001 v1(46.726,37.224) ; v1(142.636,63.792) v1(148.682,63.792)
  L4 w0.152: J7.15 20.202,30.795 23.045,33.637 24.828,33.637 25.57,34.379 35.093,34.379 37.901,31.571 45.851,31.571 46.119,31.839 46.595,31.839 v1(46.598,31.836) ; R39.1 46.726,37.249 95.773,37.249 102.2,43.675 140.808,43.675 142.302,45.17 142.302,48.417 142.162,48.557 142.162,53.268 142.636,53.743 v1(142.636,63.792) ; v1(148.682,63.792) 148.776,63.792 148.979,63.995 J1.22
GND: C31.1 C32.1 C33.1 C34.1 C35.1 C51.2 C52.1 D1.2 IC1.4 IC7.2 IC8.2 J7.36 J7.45 J7.46 R22.1 R28.1 R34.1 R40.1 | length 18.8
  L4 w0.152: v1(14.57,87.821) 14.57,87.178 C33.1 ; v1(18.761,89.548) 18.761,90.705 C51.2 19.917,90.731 20.614,91.427 IC7.2 20.909,91.357 v1(21.689,91.357) ; IC8.2 19.077,85.484 v1(20.132,85.484) D1.2 ; C52.1 v1(25.314,92.596) ; IC1.4 v1(32.121,91.427) ; C31.1 39.657,63.15 40.121,63.614 R22.1@40.198,63.614 ; C34.1 v1(38.776,46.546) ; C32.1 39.01,54.24 39.611,54.24 39.817,54.446 R28.1@39.817,54.75 ; C35.1@39.157,36.64 39.197,36.64 39.603,37.046 R40.1 40.351,37.059 v1(40.351,38.011) ; R28.1 v1(40.046,55.613) ; R22.1 v1(40.071,64.529) ; R34.1 40.173,45.847 v1(40.173,46.901)
  other v1: 11.46,6.795 19.46,6.795 27.46,6.795 35.46,6.795 43.46,6.795 51.46,6.795 59.46,6.795 67.46,6.795 75.46,6.795 83.46,6.795 91.46,6.795 99.46,6.795 107.46,6.795 115.46,6.795 123.46,6.795 131.46,6.795 139.46,6.795 147.46,6.795 155.46,6.795 15.46,14.795 23.46,14.795 31.46,14.795 39.46,14.795 47.46,14.795 55.46,14.795 63.46,14.795 71.46,14.795 79.46,14.795 87.46,14.795 95.46,14.795 103.46,14.795 111.46,14.795 119.46,14.795 127.46,14.795 135.46,14.795 143.46,14.795 151.46,14.795 19.46,22.795 35.46,22.795 51.46,22.795 59.46,22.795 67.46,22.795 75.46,22.795 83.46,22.795 91.46,22.795 99.46,22.795 115.46,22.795 123.46,22.795 131.46,22.795 139.46,22.795 147.46,22.795 155.46,22.795 55.46,30.795 63.46,30.795 71.46,30.795 79.46,30.795 87.46,30.795 95.46,30.795 111.46,30.795 119.46,30.795 127.46,30.795 135.46,30.795 143.46,30.795 151.46,30.795 3.46,38.795 107.46,38.795 115.46,38.795 123.46,38.795 131.46,38.795 139.46,38.795 31.46,46.795 39.46,46.795 47.46,46.795 15.46,62.795 23.46,62.795 35.46,70.795 91.46,70.795 99.46,70.795 115.46,70.795 123.46,70.795 131.46,70.795 139.46,70.795 155.46,70.795 7.46,78.795 15.46,78.795 31.46,78.795 47.46,78.795 55.46,78.795 63.46,78.795 71.46,78.795 79.46,78.795 103.46,78.795 111.46,78.795 119.46,78.795 127.46,78.795 135.46,78.795 3.46,86.795 11.46,86.795 27.46,86.795 35.46,86.795 43.46,86.795 51.46,86.795 59.46,86.795 67.46,86.795 75.46,86.795 83.46,86.795 147.46,86.795 155.46,86.795 7.46,94.795 15.46,94.795 23.46,94.795 31.46,94.795 39.46,94.795 47.46,94.795 55.46,94.795 63.46,94.795 71.46,94.795 79.46,94.795 87.46,94.795 95.46,94.795 103.46,94.795 111.46,94.795 119.46,94.795 127.46,94.795 135.46,94.795 143.46,94.795 151.46,94.795
NetC31_2: C31.2 L1.1 R17.2 | length 2.5
  L4 w0.152: L1.1@38.598,61.151 38.7,61.252 C31.2 38.933,62.016 39.79,62.016 R17.2@39.919,61.887
NetC32_2: C32.2 L2.1 R23.2 | length 2.7
  L4 w0.152: C32.2@38.7,53.15 38.753,53.096 L2.1 ; C32.2 39.189,52.692 R23.2@40.122,52.692
NetC34_2: C34.2 L3.1 R29.2 | length 2.9
  L4 w0.152: C34.2 39.225,44.376 40.005,44.376 R29.2@40.097,44.285 ; L3.1@38.827,43.828 38.842,43.828 39.121,44.107 R29.2
NetC35_2: C35.2 L4.1 R35.2 | length 2.5
  L4 w0.152: L4.1 L4.1@39.055,34.531 ; C35.2 L4.1@39.055,34.531 ; R35.2@40.224,34.836 40.224,34.799 39.956,34.531 L4.1@39.055,34.531
NetC51_1: C51.1 IC7.1 IC7.3 R1.2 | length 8.1
  L4 w0.152: R1.2 18.724,92.469 C51.1 21.645,92.531 22.24,91.935 22.24,90.767 21.951,90.477 IC7.1
NetJ2_1: J2.1 J3.1 | length 8.6
  L4 w0.3: J2.1 J3.1 12.588,12.535 J3.1@12.639,12.484
NetJ2_2: J2.2 J3.2 | length 27.7
  L4 w0.3: J2.2@1.565,15.075 6.492,15.075 J2.2@6.645,14.923 ; J2.2@1.666,9.893 1.768,9.995 J2.2@6.645,9.995 ; J2.2@6.645,15.075 9.82,15.075 11.09,13.805 13.63,13.805 13.63,11.341 J3.2@13.579,11.29 ; J2.2@6.67,10.097 6.746,10.097 7.915,11.265 11.09,11.265 J3.2@13.63,11.265
P3V3_AFE: C33.2 C52.2 D1.5 IC1.8 IC7.5 IC8.4 TP3.1 | length 24.8
  L1 w0.152: v1(17.294,84.48) 23.167,84.48 v1(24.171,85.484) 24.171,90.005 v1(24.399,90.234)
  L4 w0.152: C33.2 14.036,85.643 TP3.1 16.386,84.442 IC8.4 16.424,84.48 v1(17.294,84.48) ; D1.5 v1(24.171,85.484) 25.042,84.613 IC1.8 ; IC7.5 23.663,90.254 23.957,90.254 23.977,90.234 v1(24.399,90.234) 25.187,90.234 C52.2
P5V0_AFE2: J7.33 L1.2 L2.2 L3.2 L4.2 R1.1 | length 162.9
  L1 w0.152: v1(2.835,58.23) 8.504,58.23 J7.33 ; v1(37.709,61.836) 37.709,50.965 37.811,50.864 v1(37.811,44.488) ; v1@37.785,44.488 37.785,44.42 38.014,44.191 v1(38.014,35.37) v1(38.014,19.85)
  L4 w0.152: R1.1@16.119,92.489 R1.1 14.112,92.469 2.809,81.166 2.809,23.863 6.442,20.231 13.909,20.231 14.29,19.85 v1(38.014,19.85) ; L1.2@37.633,61.278 37.709,61.354 v1(37.709,61.836) ; L3.2 37.811,43.706 v1(37.811,44.488) ; v1(37.811,51.346) L2.2@37.811,51.956 ; v1(38.014,35.37) 38.014,34.551 L4.2
TEC0+: J7.31 J7.32 | length 2.3
  L1 w1.27: J7.32 J7.31
TEC0-: J7.1 J7.16 | length 3
  L1 w1.27: J7.16 11.26,64.017 12.222,63.056 13.259,63.056 13.459,62.855 J7.1
TEC3+: J7.6 J7.21 | length 3
  L1 w0.152: J7.21 12.468,52.567 J7.6
TEC3-: J7.7 J7.22 | length 3
  L1 w0.152: J7.22 12.468,50.277 J7.7
TH2_Vref0+: J7.37 R17.1 R18.2 R20.2 | length 61.5
  L1 w0.152: v1(41.57,62.598) 41.57,62.692 41.66,62.783 v1(41.66,67.588)
  L4 w0.152: J7.37 6.492,51.172 6.492,63.386 8.55,65.443 38.319,65.443 40.427,67.551 41.623,67.551 v1(41.66,67.588) ; R17.1@41.417,61.735 41.57,61.887 v1(41.57,62.598) ; R17.1 42.967,61.684 R18.2@43.043,61.608 ; R18.2 43.288,59.458 R20.2@43.322,59.423
TH2_Vref0-: J7.38 R19.2 R21.2 R22.2 | length 62.3
  L1 w0.152: v1(41.181,64.554) 41.181,68.031 v1(41.227,68.077)
  L4 w0.152: J7.38 6.188,49.187 6.188,63.512 8.424,65.748 38.192,65.748 40.478,68.034 41.185,68.034 v1(41.227,68.077) ; v1(41.181,64.554) 41.248,64.488 41.248,64.17 41.298,64.12 41.298,63.937 R22.2@41.341,63.894 ; R22.2@41.621,63.64 43.186,63.64 R21.2 ; R21.2@43.221,63.97 43.288,64.037 R19.2
TH2_Vref1+: J7.39 R23.1 R24.2 R26.2 | length 77.8
  L1 w0.152: v1(42.078,68.796) 42.139,68.735 42.139,60.945 42.078,60.884 42.078,53.099 v1(42.51,52.667)
  L4 w0.152: J7.39 5.883,47.202 5.883,63.638 8.297,66.053 38.066,66.053 40.809,68.796 v1(42.078,68.796) ; R23.1 41.824,52.667 v1(42.51,52.667) R26.2@43.094,52.667 ; R26.2 43.313,50.848 R24.2@43.322,50.838
TH2_Vref1-: J7.40 R25.2 R27.2 R28.2 | length 79.5
  L1 w0.152: v1(42.556,56.833) 42.556,56.927 42.789,57.159 v1(42.789,69.228)
  L4 w0.152: J7.40 5.451,45.344 5.451,64.199 7.61,66.358 37.94,66.358 40.988,69.406 42.158,69.406 42.31,69.253 42.764,69.253 v1(42.789,69.228) ; R28.2@41.722,54.801 41.824,54.902 R25.2@43.246,54.902 ; v1(42.556,56.833) 43.018,56.833 R27.2@43.068,56.782 ; R27.2 43.246,56.842 R25.2@43.246,54.902 ; R25.2 R25.2@43.246,54.902
TH2_Vref2+: J7.41 R29.1 R30.2 R32.2 | length 78.9
  L1 w0.152: v1(43.627,20.765) 43.627,41.085 44.343,41.8 v1(44.343,41.893)
  L4 w0.152: J7.41 6.111,37.517 6.111,29.705 9.007,26.81 18.71,26.81 24.755,20.765 v1(43.627,20.765) ; R29.1@41.722,44.26 41.722,44.214 42.058,43.879 R30.2 ; R32.2 43.44,44.123 R30.2@43.449,44.133 ; R32.2@43.627,41.847 43.673,41.893 v1(44.343,41.893)
TH2_Vref2-: J7.42 R31.2 R33.2 R34.2 | length 78.5
  L1 w0.152: v1(42.484,47.079) 42.967,46.596 v1(42.967,21.273)
  L4 w0.152: J7.42 6.696,35.811 6.696,31.636 10.912,27.419 19.269,27.419 25.517,21.171 34.001,21.171 34.102,21.273 v1(42.967,21.273) ; R34.2 43.246,45.834 R33.2@43.394,45.982 ; R34.2@41.951,46.038 42.134,46.221 42.134,46.729 v1(42.484,47.079) ; R31.2@43.221,48.07 43.338,47.952 R33.2
TH2_Vref3+: J7.43 R35.1 R36.2 R38.2 | length 54.7
  L1 w0.152: v1(42.332,35.928) 42.37,35.89 42.37,29.921 v1(42.408,29.883)
  L4 w0.152: J7.43 7.371,34.196 7.371,32.597 12.193,27.775 20.259,27.775 25.949,33.465 33.797,33.465 37.455,29.807 42.129,29.807 42.243,29.922 42.369,29.922 v1(42.408,29.883) ; R35.1 R36.2@43.195,34.963 ; R35.1@42.205,35.141 42.312,35.248 42.312,35.456 42.332,35.476 v1(42.332,35.928) ; R36.2@43.449,35.141 43.272,34.963 R36.2@43.195,34.963 ; R38.2 43.195,33.43 R36.2@43.195,34.963
TH2_Vref3-: J7.44 R37.2 R39.2 R40.2 | length 51.7
  L1 w0.152: v1(41.595,38.291) 41.595,38.197 41.748,38.044 v1(41.748,30.569)
  L4 w0.152: J7.44 8.55,32.83 13.122,28.258 20.311,28.258 25.823,33.769 34.356,33.769 37.557,30.569 v1(41.748,30.569) ; v1(41.595,38.291) 41.595,37.224 R40.2@41.773,37.046
  L4 w0.305: R40.2@41.881,37.103 42.027,37.249 R39.2 R37.2
pads on no net: D1.1 D1.3 FTG1.FTG2 FTG2.1 IC1.1 IC1.2 IC1.3 IC1.7 IC7.4 IC8.5 J1.5 J1.26

## Polygon pours and split planes (outlines as drawn)
GND on L2 (split plane): 159.489,0.51 0.51,0.51 0.51,99.49 159.489,99.49
GND on L3 (split plane): 159.489,0.51 0.51,0.51 0.51,99.49 159.489,99.49

## Keep-outs
Keep-Out Layer:
  circle w0.254: c106.238,72.631 r5.451
  circle w0.254: c106.187,27.369 r5.451
  circle w0.254: c28.997,27.369 r5.451
  circle w0.254: c28.971,72.657 r5.451
  lines w0.127: 0,0 160,0 160,100 0,100 0,0 ; 0.015,8.547 7.96,8.547 7.96,3 154.7,3 154.7,8.09 159.5,8.09 159.5,91.91 154.7,91.91 154.7,97 7.96,97 7.96,91.05 0.015,91.05 0.015,8.547

## Silkscreen, mask and mechanical layers (free items; w line width, h text height)
Top Overlay:
  text "Frequency reference module v1.0 / CTI 08.2022" at 131.943,33.795 h1.52 r90
Bottom Overlay:
  text "Frequency reference module v1.0 / CTI 08.2022" at 131.796,62.549 h1.52 r90
Top Paste:
  text ".Layer_Name" at 68.34,-18.58 h1.91
Top Solder:
  text ".Layer_Name" at 68.34,-16.04 h1.91
Mechanical 1:
  drawing of 299 lines, arcs and shapes, not listed
  text "Layer" at 12.652,158.28 h1.52
  text "Name" at 23.064,158.28 h1.52
  text "Material" at 46.679,158.28 h1.52
  text "Thickness" at 68.517,158.28 h1.52
  text "Constant" at 85.023,158.28 h1.52
  text "Board Layer Stack" at 99.498,158.28 h1.52
  text "Top Overlay" at 23.064,155.232 h1.52
  text "Top Solder" at 23.064,152.184 h1.52
  text "Solder Resist" at 46.679,152.184 h1.52
  text "0,010mm" at 68.517,152.184 h1.52
  text "3.5" at 85.023,152.184 h1.52
  text "1" at 12.652,149.136 h1.52
  text "L1" at 23.064,149.136 h1.52
  text "0,035mm" at 68.517,149.136 h1.52
  text "Dielectric 1" at 23.064,146.088 h1.52
  text "PP-006" at 46.679,146.088 h1.52
  text "0,360mm" at 68.517,146.088 h1.52
  text "4.1" at 85.023,146.088 h1.52
  text "2" at 12.652,143.04 h1.52
  text "L2" at 23.064,143.04 h1.52
  text "CF-004" at 46.679,143.04 h1.52
  text "0,035mm" at 68.517,143.04 h1.52
  text "Dielectric1" at 23.064,139.992 h1.52
  text "FR-4" at 46.679,139.992 h1.52
  text "0,710mm" at 68.517,139.992 h1.52
  text "4.8" at 85.023,139.992 h1.52
  text "3" at 12.652,136.944 h1.52
  text "L3" at 23.064,136.944 h1.52
  text "CF-004" at 46.679,136.944 h1.52
  text "0,035mm" at 68.517,136.944 h1.52
  text "Dielectric 2" at 23.064,133.896 h1.52
  text "PP-006" at 46.679,133.896 h1.52
  text "0,360mm" at 68.517,133.896 h1.52
  text "4.1" at 85.023,133.896 h1.52
  text "4" at 12.652,130.848 h1.52
  text "L4" at 23.064,130.848 h1.52
  text "0,035mm" at 68.517,130.848 h1.52
  text "Bottom Solder" at 23.064,127.8 h1.52
  text "Solder Resist" at 46.679,127.8 h1.52
  text "0,010mm" at 68.517,127.8 h1.52
  text "3.5" at 85.023,127.8 h1.52
  text "Bottom Overlay" at 23.064,124.752 h1.52
  text "Total board thickness:" at 12.652,121.704 h1.52
  text "1,590mm" at 68.517,121.704 h1.52
Mechanical 3:
  circle w0.127: c3.57,94.45 r2.25
  circle w0.127: c3.57,5.55 r2.25
  lines w0.127: -21.04,-2.75 -22.04,-2.75 -22.04,-4.75 -5.04,-4.75 ; -21.04,7.95 -22.04,7.95 -22.04,9.95 -18.95,9.95 -13.534,6.45 ccw(c-10.821,10.65) -10.821,5.65 -5.04,5.65 ; -20.04,-2.75 -7.44,-2.75 -7.44,3.65 -12.886,3.65 -19.54,7.95 -20.04,7.95 ; -15.04,-13.75 -7.84,-13.75 ; -15.04,-13.25 -7.84,-13.25 ; -15.04,-12.75 -7.84,-12.75 ; -15.04,-12.25 -7.84,-12.25 ; -15.04,-11.75 -7.84,-11.75 ; -15.04,-11.25 -7.84,-11.25 ; -15.04,-10.75 -7.84,-10.75 ; -15.04,-10.25 -7.84,-10.25 ; -15.04,-9.75 -7.84,-9.75 ; -15.04,-9.25 -7.84,-9.25 ; -15.04,-8.75 -7.84,-8.75 ; -15.04,108.75 -7.84,108.75 ; -15.04,109.25 -7.84,109.25 ; -15.04,109.75 -7.84,109.75 ; -15.04,110.25 -7.84,110.25 ; -15.04,110.75 -7.84,110.75 ; -15.04,111.25 -7.84,111.25 ; -15.04,111.75 -7.84,111.75 ; -15.04,112.25 -7.84,112.25 ; -15.04,112.75 -7.84,112.75 ; -15.04,113.25 -7.84,113.25 ; -15.04,113.75 -7.84,113.75 ; -2.54,-12.25 4.16,-12.25 5.16,-11.25 4.16,-10.25 -2.54,-10.25 ; -2.54,-2.55 7.46,-2.55 7.46,8.45 -2.54,8.45 ; -2.54,110.25 4.16,110.25 5.16,111.25 4.16,112.25 -2.54,112.25 ; 0,-2.55 0,8.45 ; 0,91.55 0,102.55 ; 1.665,4.352 4.767,7.455 ; 1.665,93.252 4.767,96.355 ; 2.372,3.645 5.474,6.748 ; 2.372,92.545 5.474,95.648 ; -15.04,-14.25 -15.84,-13.45 -15.84,-9.05 -15.04,-8.25 ; -15.04,-14.25 -15.04,-8.25 ; -15.04,-14.25 -7.84,-14.25 ; -15.04,-8.25 -7.84,-8.25 ; -15.04,108.25 -15.84,109.05 -15.84,113.45 -15.04,114.25 ; -15.04,108.25 -15.04,114.25 ; -15.04,108.25 -7.84,108.25 ; -15.04,114.25 -7.84,114.25 ; -7.84,-14.25 -5.04,-14.25 -5.04,-8.25 -7.84,-8.25 ; -7.84,-14.25 -7.84,-8.25 ; -7.84,108.25 -5.04,108.25 -5.04,114.25 -7.84,114.25 ; -7.84,108.25 -7.84,114.25 ; -21.04,-3.7 -20.04,-3.7 -20.04,8.9 -21.04,8.9 -21.04,-3.7 ; -9.04,-1.3 ccw(c-8.54,-1.3) -8.54,-1.8 -7.44,-1.8 -7.44,2.7 -8.54,2.7 ccw(c-8.54,2.2) -9.04,2.2 -9.04,0.85 -8.24,0.85 -8.24,0.05 -9.04,0.05 -9.04,-1.3 ; -5.04,-14.35 -2.54,-14.35 -2.54,114.35 -5.04,114.35 -5.04,-14.35 ; -2.54,91.55 7.46,91.55 7.46,102.55 -2.54,102.55 -2.54,91.55
Corners:
  lines w0.254: -5,0 0,0 0,-5 ; -5,100 0,100 0,105 ; 160,-5 160,0 165,0 ; 160,105 160,100 165,100
Title Block:
  circle w0.305: c11.825,-13.5 r3.81
  lines w0.254: 9.92,-14.762 ccw(c14.365,-14.77) 10.633,-12.356 ; 18.81,-14.77 18.81,-10.325 ; 21.35,-17.945 63.26,-17.945 ; 21.35,-14.77 63.26,-14.77 ; 21.35,-11.595 63.26,-11.595 ; 35.32,-21.12 35.32,-8.42 ; 7.38,-21.12 20.08,-21.12 20.08,-8.42 7.38,-8.42 7.38,-21.12 ; 21.35,-21.12 63.26,-21.12 63.26,-8.42 21.35,-8.42 21.35,-21.12
  lines w0.305: 8.269,-14.872 9.285,-17.945 ; 11.317,-20.993 14.39,-16.319 ; 11.825,-9.69 19.445,-9.055 ; 15.559,-12.738 18.175,-21.12
  text "Number" at 22.62,-10.96 h1.91
  text "EDA-0XXXX-V1" at 36.59,-10.96 h1.91
  text "Drawn By" at 22.62,-14.135 h1.91
  text "CEGELEC XXX" at 36.59,-14.135 h1.91
  text "CERN" at 8.65,-14.389 h2.54
  text "DATE" at 22.62,-17.31 h1.91
  text "XX-XX-XXXX" at 36.59,-17.31 h1.91
  text "MOD." at 22.62,-20.485 h1.91
  text "-" at 36.59,-20.485 h1.91
  text "Print Date" at 22.62,-23.66 h1.27
  text ".Print_Date" at 37.86,-23.66 h1.27
  text ".Print_Time" at 50.56,-23.66 h1.27
  text ".Print_Scale" at 22.62,-26.2 h1.27
Notvisible:
  drawing of 206 lines, arcs and shapes, not listed
  text "c" at 149.338,90.29 h1
  text "a" at 154.332,90.272 h1
  text "z" at 156.89,90.29 h1
  text "d" at 146.748,90.158 h1
  text "b" at 151.792,90.158 h1
  text "154.7,89.37 (mm)" at 155.335,89.37 h1.52
  text "1" at 144.29,88.87 h1
  text "GRID ORG" at 162.32,52.54 h2
  text "157.24,50 (mm)" at 157.875,50 h1.52
  text "32" at 143.81,10.126 h1
  text "0,0 (mm)" at 0.635,0 h1.52
Drill Drawing:
  text ".LEGEND" at 25.16,110.96 h2

## Dimensions
0,0 to 3.57,5.55 on Drill Drawing
0,0 to 3.57,5.55 on Drill Drawing
160,0 to 160,100 on Drill Drawing
0,100 to 160,100 on Drill Drawing

## Text inside footprints (layer, text, board x,y; h text height)
J1: Top Overlay "26" at 152.136,68.44 h1.02 r90; Mechanical 14 "26" at 152.136,68.44 h1.02 r90
J7: Top Overlay "15" at 14.29,27.535 h1.2 r90; Top Overlay "31" at 9.19,64.435 h1.2 r90; Top Overlay "44" at 9.09,29.535 h1.2 r90; Top Overlay "30" at 11.69,28.535 h1.2 r90; Top Overlay "1" at 14.29,64.535 h1.2 r90; Mechanical 14 "15" at 14.29,27.535 h1.2 r90; Mechanical 14 "31" at 9.19,64.435 h1.2 r90; Mechanical 14 "44" at 9.09,29.535 h1.2 r90; Mechanical 14 "30" at 11.69,28.535 h1.2 r90; Mechanical 14 "1" at 14.29,64.535 h1.2 r90; Notvisible "PCB Edge" at 1.49,44.035 h1 r90